# Altium PCB PCB3.PcbDoc (part 2 of 2)
Units mm, origin at the board's own origin, x right, y up, seen from the top; angles counter-clockwise.
Board outline 121.9 x 82.3 mm, 2 copper layers (Top Layer, Bottom Layer); 257 components, 205 nets, 679 pads, 84 vias.
Unrouted connection lines stored in the file: 88.
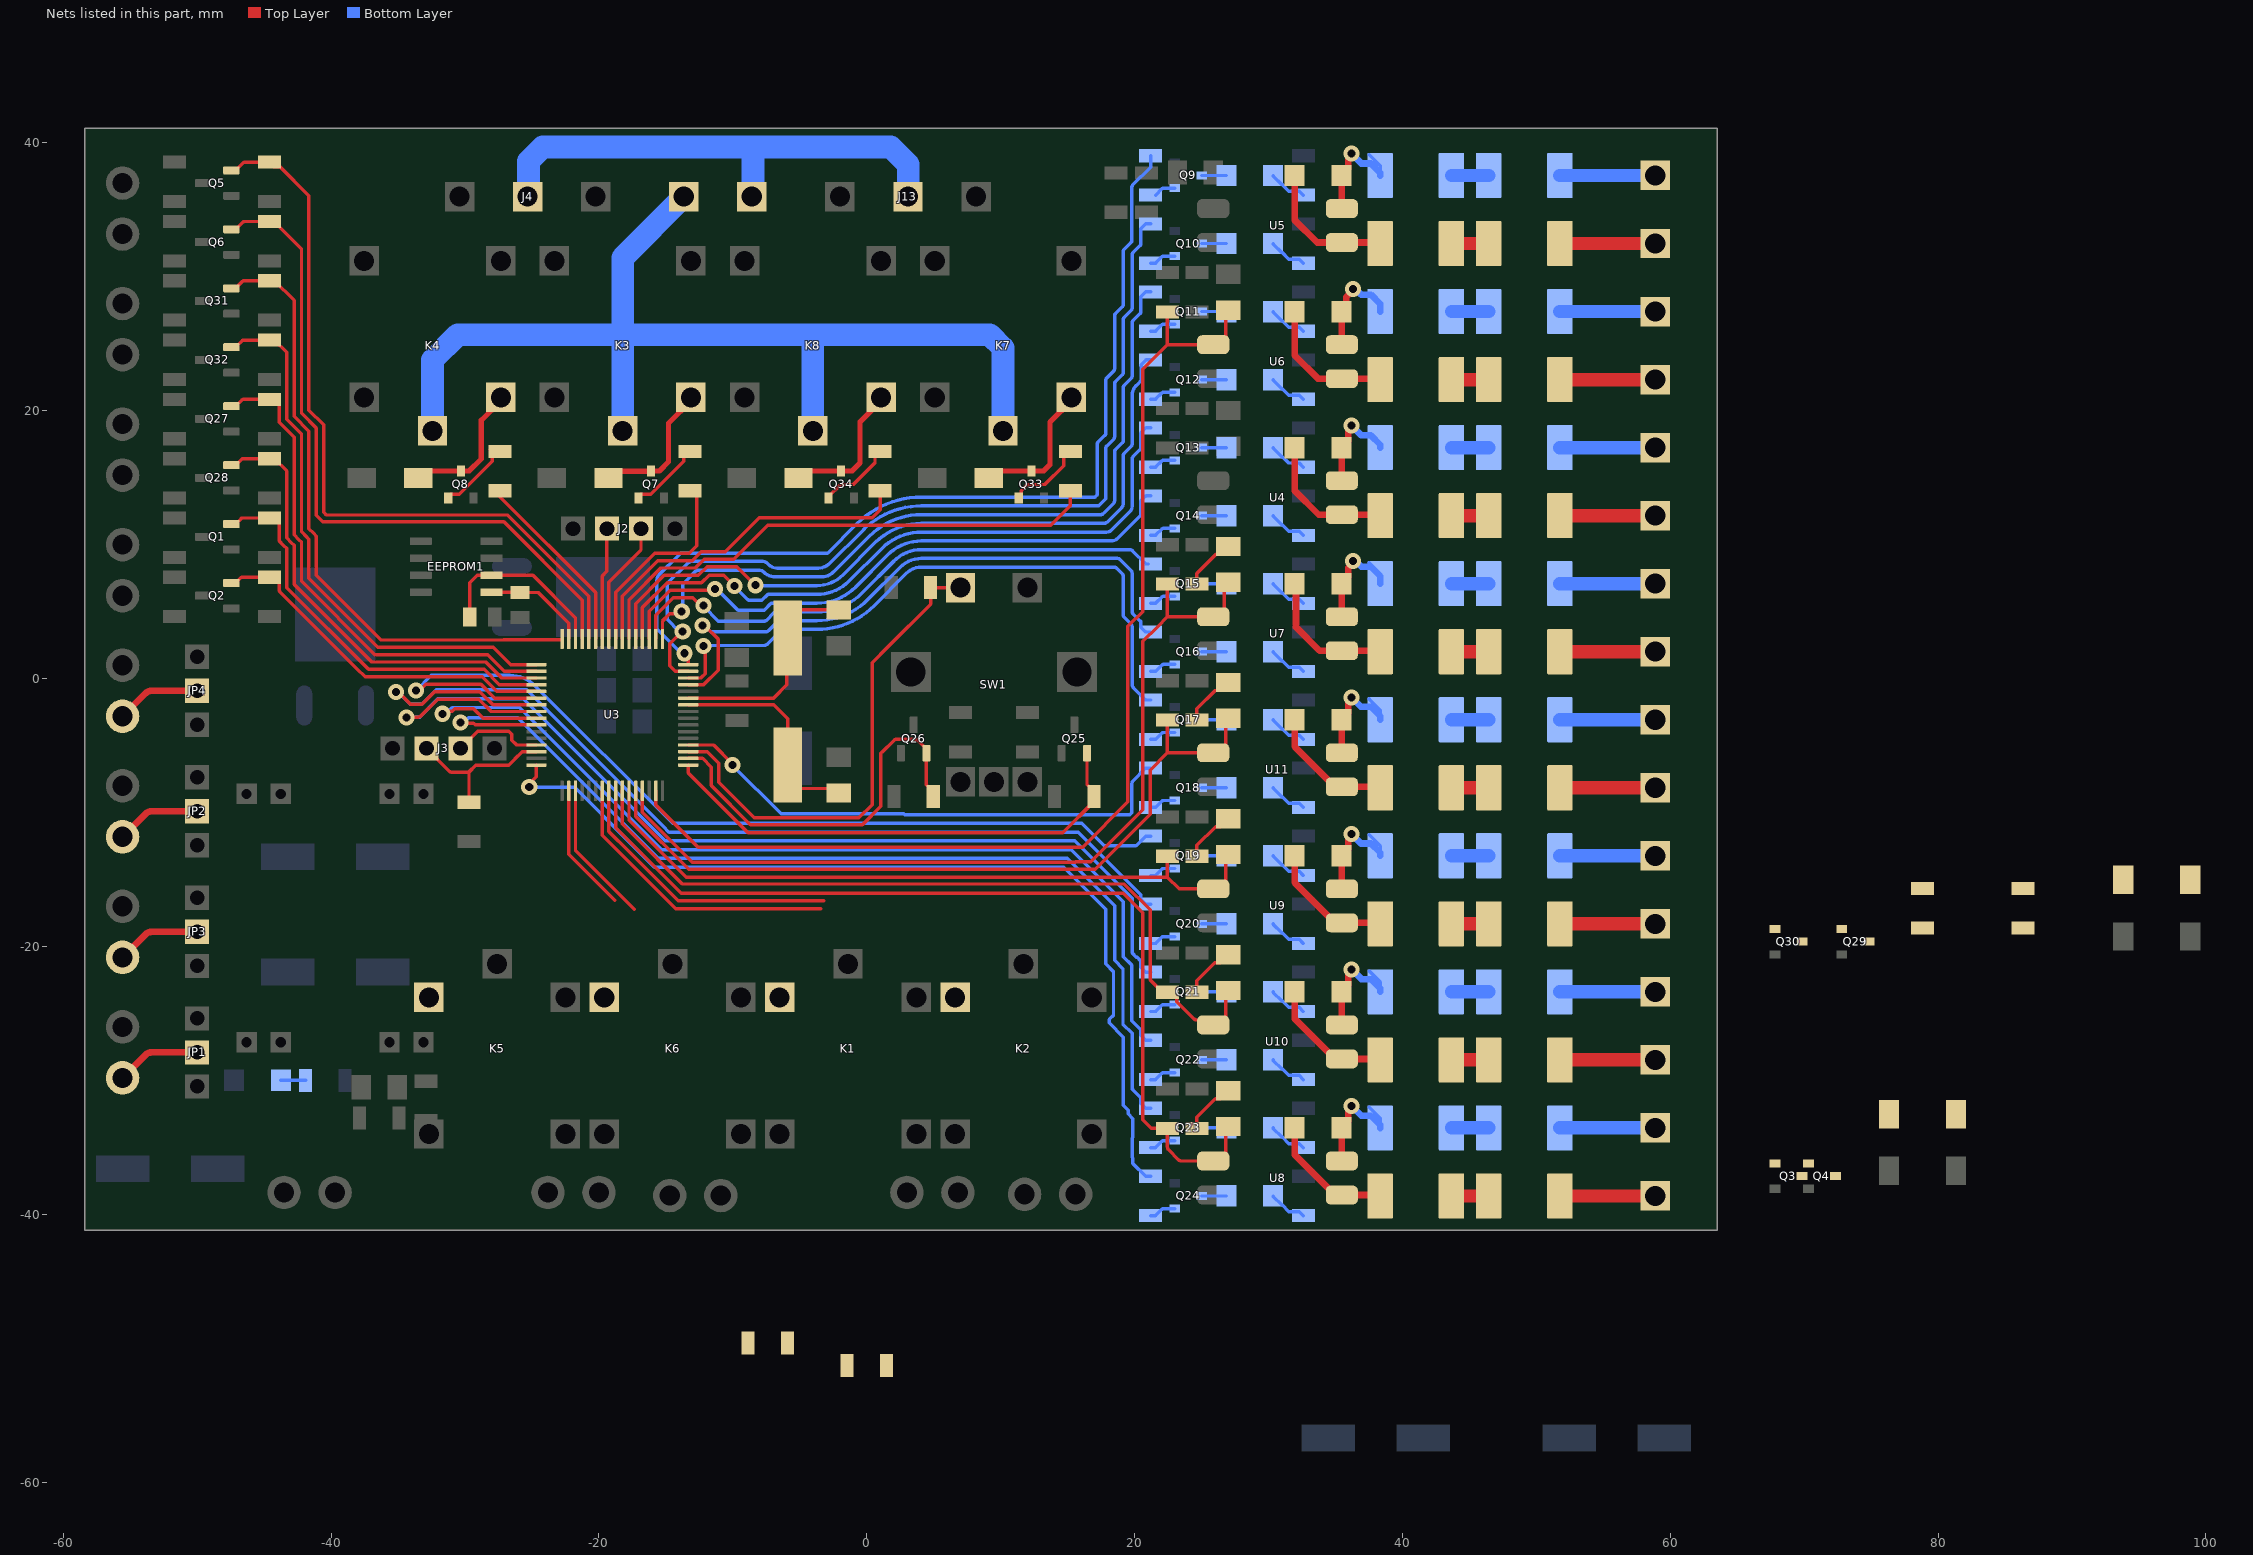
[diagram p2: the nets of this part, all layers, seen from the top]

## Via types
v1: diameter 1.2, hole 0.6, Top Layer to Bottom Layer, tented both sides, 74 vias
v2: diameter 1.2, hole 0.6, Top Layer to Bottom Layer, 10 vias

## Nets (pads, with @x,y where several pads share a name; then routed paths per layer and width w, separated by ;. In a path a pad name is that pad's centre, name@x,y a point inside that pad or via, vN(x,y) a via of type N, cw(c..) or ccw(c..) an arc to the next point about the centre after c; other vN are vias at no path point) (continued)
NetC15_2: C15.2 R77.2 U3.63 U6.3 | length 83.1
  Top Layer w0.254: U3.63@-15.75,-8.37 -15.75,-9.412 -15.736,-9.426 -15.736,-9.44 -12.6,-12.576 16.124,-12.576 19.501,-9.199 19.501,3.901 20.609,5.009 20.609,23.104 22.45,24.945 ; R77.2@22.45,27.385 22.45,24.945 ; U6.3@25.875,24.945 22.45,24.945 ; U6.3@26.254,24.945 26.8,25.491 26.8,27.327 C15.2@26.992,27.519
NetC16_1: C16.1 R80.2 | length 4
  Top Layer w0.254: R80.2@24.656,7.065 24.656,7.856 26.078,9.278 26.399,9.278 C16.1@26.992,9.871
NetC16_2: C16.2 R78.2 U3.61 U7.3 | length 66.4
  Top Layer w0.254: -16.75,-9.993 U3.61@-16.75,-8.37 ; -16.736,-9.993 -16.736,-10.007 -13.046,-13.696 15.578,-13.696 cw(c15.607,-13.726) 15.607,-13.684 16.716,-13.684 20.609,-9.791 20.609,2.784 21.717,3.892 22.45,4.625 ; R78.2@22.45,7.065 22.45,4.625 ; C16.2@26.992,7.199 26.7,6.907 26.7,5.071 26.254,4.625 U7.3@25.875,4.625 22.45,4.625
NetC17_1: C17.1 R91.2 | length 4
  Top Layer w0.254: R91.2@24.656,-33.575 24.656,-32.744 26.038,-31.362 26.399,-31.362 C17.1@26.992,-30.769
NetC17_2: C17.2 R89.2 U3.57 U8.3 | length 70.8
  Top Layer w0.254: U3.57@-18.75,-8.37 -18.75,-11.126 -17.536,-12.341 -13.853,-16.023 19.148,-16.023 20.609,-17.484 20.609,-32.928 21.256,-33.575 22.331,-33.575 cw(c22.331,-33.694) 22.45,-33.694 22.45,-34.97 ccw(c22.763,-34.97) 22.542,-35.191 23.274,-35.923 ccw(c23.495,-35.702) 23.495,-36.015 U8.3@25.875,-36.015 26.15,-36.015 ccw(c26.15,-35.763) 26.328,-35.941 26.8,-35.469 26.8,-33.633 C17.2@26.992,-33.441
NetC18_1: C18.1 R92.2 | length 4
  Top Layer w0.254: R92.2@24.656,-13.255 24.656,-12.444 26.058,-11.042 26.399,-11.042 C18.1@26.992,-10.449
NetC18_2: C18.2 R90.2 U3.59 U9.3 | length 52.8
  Top Layer w0.254: -17.75,-10.559 U3.59@-17.75,-8.37 ; -17.736,-10.559 -17.736,-10.573 -13.489,-14.82 22.45,-14.82 ; R90.2@22.45,-13.255 22.45,-14.82 ; C18.2@26.992,-13.121 26.8,-13.313 26.8,-15.149 26.254,-15.695 U9.3@25.875,-15.695 23.325,-15.695 22.45,-14.82
NetC19_1: C19.1 R103.2 | length 4
  Top Layer w0.254: R103.2@24.656,-23.415 24.656,-22.544 25.998,-21.202 26.399,-21.202 C19.1@26.992,-20.609
NetC19_2: C19.2 R101.2 U3.58 U10.3 | length 59.3
  Top Layer w0.254: U3.58@-18.25,-8.37 -18.25,-10.843 -17.699,-11.394 -17.543,-11.55 -13.759,-15.334 19.234,-15.334 21.163,-17.263 21.163,-22.498 22.08,-23.415 22.777,-23.415 23.14,-23.778 23.14,-24.073 ccw(c23.219,-24.073) 23.164,-24.129 24.45,-25.415 ccw(c24.618,-25.247) 24.618,-25.485 25.452,-25.485 cw(c25.452,-25.611) 25.542,-25.522 25.848,-25.828 ccw(c25.913,-25.763) 25.913,-25.855 26.216,-25.855 ccw(c26.216,-25.763) 26.281,-25.828 26.8,-25.309 26.8,-23.473 C19.2@26.992,-23.281
NetC20_1: C20.1 R104.2 | length 4
  Top Layer w0.254: R104.2@24.656,-3.095 24.656,-2.244 26.018,-0.882 26.399,-0.882 C20.1@26.992,-0.289
NetC20_2: C20.2 R102.2 U3.60 U11.3 | length 57.9
  Top Layer w0.254: -17.25,-10.276 U3.60@-17.25,-8.37 ; -17.236,-10.276 -17.236,-10.29 -13.288,-14.238 17.062,-14.238 21.163,-10.137 21.163,-6.822 22.45,-5.535 ; R102.2@22.45,-3.095 22.45,-5.535 ; C20.2@26.992,-2.961 26.8,-3.153 26.8,-4.989 26.254,-5.535 U11.3@25.875,-5.535 22.45,-5.535
NetD1_2: D1.2 R1.1 | length 1.9
  Bottom Layer w0.254: D1.2@-43.75,-30 R1.1@-41.9,-30
NetD2_A: D2.A K1.5 Q3.3
NetD3_A: D3.A K2.5 Q4.3
NetD4_A: D4.A K3.5 Q7.3 | length 10.1
  Top Layer w0.254: K3.5@-13.125,20.75 K3.5@-13.125,21
  Top Layer w0.4: D4.A@-19.285,15.5 Q7.3@-16.3,15.5 ; Q7.3@-16.1,15.51 -15.49,15.51 -14.8,16.2 -14.8,19.075 K3.5@-13.125,20.75
NetD5_A: D5.A K4.5 Q8.3 | length 10.5
  Top Layer w0.254: D5.A@-33.485,15 D5.A@-32.975,15.51 ; K4.5@-27.325,20.75 K4.5@-27.325,21
  Top Layer w0.4: D5.A@-32.975,15.51 Q8.3@-30.3,15.51 -29.69,15.51 -28.787,16.413 -28.787,19.288 K4.5@-27.325,20.75
NetD6_1: D6.1 Q9.3 | length 1.8
  Bottom Layer w0.254: Q9.3@25.01,37.575 D6.1@26.85,37.575
NetD6_2: D6.2 R20.1 | length 2.9
  Bottom Layer w0.254: D6.2@30.35,37.575 30.35,37.525 30.973,36.902 31.023,36.902 31.52,36.405 32.3,36.405 R20.1@32.6,36.105
NetD7_1: D7.1 Q10.3 | length 1.8
  Bottom Layer w0.254: Q10.3@25.01,32.495 D7.1@26.85,32.495
NetD7_2: D7.2 R21.1 | length 2.9
  Bottom Layer w0.254: D7.2@30.35,32.495 30.35,32.445 30.973,31.822 31.023,31.822 31.52,31.325 32.3,31.325 R21.1@32.6,31.025
NetD8_1: D8.1 Q11.3 | length 1.8
  Bottom Layer w0.254: Q11.3@25.01,27.415 D8.1@26.85,27.415
NetD8_2: D8.2 R22.1 | length 2.9
  Bottom Layer w0.254: D8.2@30.35,27.415 30.35,27.365 30.973,26.742 31.023,26.742 31.52,26.245 32.3,26.245 R22.1@32.6,25.945
NetD9_1: D9.1 Q12.3 | length 1.8
  Bottom Layer w0.254: Q12.3@25.01,22.335 D9.1@26.85,22.335
NetD9_2: D9.2 R23.1 | length 2.9
  Bottom Layer w0.254: D9.2@30.35,22.335 30.35,22.285 30.973,21.662 31.023,21.662 31.52,21.165 32.3,21.165 R23.1@32.6,20.865
NetD10_1: D10.1 Q13.3 | length 1.8
  Bottom Layer w0.254: Q13.3@25.01,17.255 D10.1@26.85,17.255
NetD10_2: D10.2 R24.1 | length 2.9
  Bottom Layer w0.254: D10.2@30.35,17.255 30.35,17.205 30.973,16.582 31.023,16.582 31.501,16.104 32.281,16.104 R24.1@32.6,15.785
NetD11_1: D11.1 Q14.3 | length 1.8
  Bottom Layer w0.254: Q14.3@25.01,12.175 D11.1@26.85,12.175
NetD11_2: D11.2 R25.1 | length 2.9
  Bottom Layer w0.254: D11.2@30.35,12.175 30.35,12.125 30.973,11.502 31.023,11.502 31.52,11.005 32.3,11.005 R25.1@32.6,10.705
NetD12_1: D12.1 Q15.3 | length 1.8
  Bottom Layer w0.254: Q15.3@25.01,7.095 D12.1@26.85,7.095
NetD12_2: D12.2 R26.1 | length 2.9
  Bottom Layer w0.254: D12.2@30.35,7.095 30.35,7.045 30.973,6.422 31.023,6.422 31.509,5.936 32.289,5.936 R26.1@32.6,5.625
NetD13_1: D13.1 Q16.3 | length 1.8
  Bottom Layer w0.254: Q16.3@25.01,2.015 D13.1@26.85,2.015
NetD13_2: D13.2 R27.1 | length 2.9
  Bottom Layer w0.254: D13.2@30.35,2.015 30.35,1.965 30.973,1.342 31.023,1.342 31.52,0.845 32.3,0.845 R27.1@32.6,0.545
NetD14_1: D14.1 Q17.3 | length 1.8
  Bottom Layer w0.254: Q17.3@25.01,-3.065 D14.1@26.85,-3.065
NetD14_2: D14.2 R36.1 | length 2.9
  Bottom Layer w0.254: D14.2@30.35,-3.065 30.35,-3.115 30.973,-3.738 31.023,-3.738 31.52,-4.235 32.3,-4.235 R36.1@32.6,-4.535
NetD15_1: D15.1 Q18.3 | length 1.8
  Bottom Layer w0.254: Q18.3@25.01,-8.145 D15.1@26.85,-8.145
NetD15_2: D15.2 R37.1 | length 2.9
  Bottom Layer w0.254: D15.2@30.35,-8.145 30.35,-8.195 30.973,-8.818 31.023,-8.818 31.512,-9.307 32.292,-9.307 R37.1@32.6,-9.615
NetD16_1: D16.1 Q19.3 | length 1.8
  Bottom Layer w0.254: Q19.3@25.01,-13.225 D16.1@26.85,-13.225
NetD16_2: D16.2 R38.1 | length 2.9
  Bottom Layer w0.254: D16.2@30.35,-13.225 30.35,-13.275 30.973,-13.898 31.023,-13.898 31.508,-14.383 32.288,-14.383 R38.1@32.6,-14.695
NetD17_1: D17.1 Q20.3 | length 1.8
  Bottom Layer w0.254: Q20.3@25.01,-18.305 D17.1@26.85,-18.305
NetD17_2: D17.2 R39.1 | length 2.9
  Bottom Layer w0.254: D17.2@30.35,-18.305 30.35,-18.355 30.973,-18.978 31.023,-18.978 31.509,-19.464 32.289,-19.464 R39.1@32.6,-19.775
NetD18_1: D18.1 Q21.3 | length 1.8
  Bottom Layer w0.254: Q21.3@25.01,-23.385 D18.1@26.85,-23.385
NetD18_2: D18.2 R40.1 | length 2.9
  Bottom Layer w0.254: D18.2@30.35,-23.385 30.35,-23.435 30.973,-24.058 31.023,-24.058 31.503,-24.538 32.283,-24.538 R40.1@32.6,-24.855
NetD19_1: D19.1 Q22.3 | length 1.8
  Bottom Layer w0.254: Q22.3@25.01,-28.465 D19.1@26.85,-28.465
NetD19_2: D19.2 R41.1 | length 2.9
  Bottom Layer w0.254: D19.2@30.35,-28.465 30.35,-28.515 30.973,-29.138 31.023,-29.138 31.505,-29.62 32.285,-29.62 R41.1@32.6,-29.935
NetD20_1: D20.1 Q23.3 | length 1.8
  Bottom Layer w0.254: Q23.3@25.01,-33.545 D20.1@26.85,-33.545
NetD20_2: D20.2 R42.1 | length 2.9
  Bottom Layer w0.254: D20.2@30.35,-33.545 30.35,-33.595 30.973,-34.218 31.023,-34.218 31.52,-34.715 32.3,-34.715 R42.1@32.6,-35.015
NetD21_1: D21.1 Q24.3 | length 1.8
  Bottom Layer w0.254: Q24.3@25.01,-38.625 D21.1@26.85,-38.625
NetD21_2: D21.2 R43.1 | length 2.9
  Bottom Layer w0.254: D21.2@30.35,-38.625 30.35,-38.675 30.973,-39.298 31.023,-39.298 31.52,-39.795 32.3,-39.795 R43.1@32.6,-40.095
NetD22_1: D22.1 R58.2 U4.1 | length 10.9
  Top Layer w0.254: U4.1@34.975,12.245 U4.1@35.475,12.245 ; R58.2@38.27,12.245 R58.2@38.34,12.175
  Top Layer w0.5: D22.1@31.95,17.255 31.95,14.05 33.755,12.245 34.975,12.245 U4.1@35.475,12.245 R58.2@38.27,12.245
NetD22_2: D22.2 R62.2 U4.2 | length 7.4
  Top Layer w0.254: D22.2@35.45,17.255 D22.2@35.475,17.23
  Top Layer w0.5: D22.2@35.45,17.255 35.95,17.755 35.95,18.461 36.2,18.711 v1(36.2,18.9) ; U4.2@35.475,14.785 D22.2@35.475,17.23
  Bottom Layer w0.5: v1(36.2,18.9) 36.933,18.167 37.64,18.167 38.34,17.467 R62.2@38.34,17.255
NetD23_1: D23.1 R60.2 U5.1 | length 10.4
  Top Layer w0.254: R60.2@38.27,32.565 R60.2@38.34,32.495
  Top Layer w0.5: D23.1@31.95,37.575 31.95,34.25 33.635,32.565 R60.2@38.27,32.565
NetD23_2: D23.2 R64.2 U5.2 | length 9.2
  Top Layer w0.254: D23.2@35.45,37.575 D23.2@35.475,37.55
  Top Layer w0.5: D23.2@35.45,37.575 35.95,38.075 35.95,38.761 36.2,39.011 v1(36.2,39.2) ; U5.2@35.475,35.105 D23.2@35.475,37.55
  Bottom Layer w0.254: R64.2@37.517,39.133 38.34,38.31 R64.2@38.34,37.575
  Bottom Layer w0.5: v1(36.2,39.2) 36.933,38.467 37.64,38.467 38.34,37.767 R64.2@38.34,37.575
NetD24_1: D24.1 R70.2 U6.1 | length 10.9
  Top Layer w0.254: U6.1@34.975,22.405 U6.1@35.475,22.405 ; R70.2@38.27,22.405 R70.2@38.34,22.335
  Top Layer w0.5: D24.1@31.95,27.415 31.95,24.15 33.695,22.405 34.975,22.405 U6.1@35.475,22.405 R70.2@38.27,22.405
NetD24_2: D24.2 R74.2 U6.2 | length 7.6
  Top Layer w0.254: D24.2@35.475,27.39 D24.2@35.45,27.415 D24.2@35.8,27.765 ; v1@36.3,28.978 v1(36.3,29.1)
  Top Layer w0.5: U6.2@35.475,24.945 D24.2@35.475,27.39 ; D24.2@35.8,27.765 35.8,28.478 v1@36.3,28.978
  Bottom Layer w0.5: v1(36.3,29.1) 36.489,29.1 36.915,28.675 37.64,28.675 38.34,27.975 R74.2@38.34,27.415
NetD25_1: D25.1 R72.2 U7.1 | length 10.3
  Top Layer w0.5: D25.1@31.95,7.095 32.05,6.995 32.05,3.85 33.815,2.085 38.27,2.085 R72.2@38.34,2.015
NetD25_2: D25.2 R76.2 U7.2 | length 9.5
  Top Layer w0.254: D25.2@35.45,7.095 D25.2@35.475,7.07
  Top Layer w0.5: D25.2@35.45,7.095 35.95,7.595 35.95,8.261 36.3,8.611 v1(36.3,8.8) ; U7.2@35.475,4.625 D25.2@35.475,7.07
  Bottom Layer w0.254: R76.2@37.517,8.653 38.34,7.83 R76.2@38.34,7.095
  Bottom Layer w0.5: v1(36.3,8.8) 36.489,8.8 36.935,8.355 37.64,8.355 38.34,7.655 R76.2@38.34,7.095
NetD26_1: D26.1 R82.2 U8.1 | length 9.7
  Top Layer w0.254: U8.1@34.975,-38.555 U8.1@35.475,-38.555 ; R82.2@38.27,-38.555 R82.2@38.34,-38.625
  Top Layer w0.5: D26.1@31.95,-33.545 31.95,-35.53 U8.1@34.975,-38.555 ; U8.1@35.475,-38.555 R82.2@38.27,-38.555
NetD26_2: D26.2 R86.2 U8.2 | length 9.3
  Top Layer w0.254: D26.2@35.45,-33.545 D26.2@35.475,-33.57
  Top Layer w0.5: D26.2@35.45,-33.545 35.95,-33.045 35.95,-32.339 36.2,-32.089 v1(36.2,-31.9) ; U8.2@35.475,-36.015 D26.2@35.475,-33.57
  Bottom Layer w0.254: R86.2@37.517,-31.987 38.34,-32.81 R86.2@38.34,-33.545
  Bottom Layer w0.5: v1(36.2,-31.9) 36.933,-32.633 37.64,-32.633 38.34,-33.333 R86.2@38.34,-33.545
NetD27_1: D27.1 R84.2 U9.1 | length 9.7
  Top Layer w0.254: U9.1@34.975,-18.235 U9.1@35.475,-18.235 ; R84.2@38.27,-18.235 R84.2@38.34,-18.305
  Top Layer w0.5: D27.1@31.95,-13.225 31.95,-15.21 U9.1@34.975,-18.235 ; U9.1@35.475,-18.235 R84.2@38.27,-18.235
NetD27_2: D27.2 R88.2 U9.2 | length 9.3
  Top Layer w0.254: D27.2@35.45,-13.225 D27.2@35.475,-13.25
  Top Layer w0.5: D27.2@35.45,-13.225 35.95,-12.725 35.95,-12.039 36.2,-11.789 v1(36.2,-11.6) ; U9.2@35.475,-15.695 D27.2@35.475,-13.25
  Bottom Layer w0.254: R88.2@37.517,-11.667 38.34,-12.49 R88.2@38.34,-13.225
  Bottom Layer w0.5: v1(36.2,-11.6) 36.9,-12.3 37.64,-12.3 38.34,-13 R88.2@38.34,-13.225
NetD28_1: D28.1 R94.2 U10.1 | length 9.7
  Top Layer w0.254: U10.1@34.975,-28.395 U10.1@35.475,-28.395 ; R94.2@38.27,-28.395 R94.2@38.34,-28.465
  Top Layer w0.5: D28.1@31.95,-23.385 31.95,-25.37 U10.1@34.975,-28.395 ; U10.1@35.475,-28.395 R94.2@38.27,-28.395
NetD28_2: D28.2 R98.2 U10.2 | length 9.4
  Top Layer w0.254: D28.2@35.45,-23.385 D28.2@35.475,-23.41
  Top Layer w0.5: D28.2@35.45,-23.385 35.95,-22.885 35.95,-22.139 36.2,-21.889 v1(36.2,-21.7) ; U10.2@35.475,-25.855 D28.2@35.475,-23.41
  Bottom Layer w0.254: R98.2@37.517,-21.827 38.34,-22.65 R98.2@38.34,-23.385
  Bottom Layer w0.5: v1(36.2,-21.7) 36.933,-22.433 37.64,-22.433 38.34,-23.133 R98.2@38.34,-23.385
NetD29_1: D29.1 R96.2 U11.1 | length 9.7
  Top Layer w0.254: U11.1@34.975,-8.075 U11.1@35.475,-8.075 ; R96.2@38.27,-8.075 R96.2@38.34,-8.145
  Top Layer w0.5: D29.1@31.95,-3.065 31.95,-5.05 U11.1@34.975,-8.075 ; U11.1@35.475,-8.075 R96.2@38.27,-8.075
NetD29_2: D29.2 R100.2 U11.2 | length 9.3
  Top Layer w0.254: D29.2@35.45,-3.065 D29.2@35.475,-3.09
  Top Layer w0.5: D29.2@35.45,-3.065 35.95,-2.565 35.95,-1.839 36.2,-1.589 v1(36.2,-1.4) ; U11.2@35.475,-5.535 D29.2@35.475,-3.09
  Bottom Layer w0.254: R100.2@37.517,-1.507 37.517,-1.537 38.34,-2.36 R100.2@38.34,-3.065
  Bottom Layer w0.5: v1(36.2,-1.4) 36.9,-2.1 37.64,-2.1 38.34,-2.8 R100.2@38.34,-3.065
NetD30_A: D30.A K5.5 Q29.3
NetD31_A: D31.A K6.5 Q30.3
NetD32_A: D32.A K7.5 Q33.3 | length 10.7
  Top Layer w0.4: D32.A@9.115,15 9.625,15.51 13.21,15.51 13.684,15.984 13.684,19.159 15.275,20.75 K7.5@15.275,21
NetD33_A: D33.A K8.5 Q34.3 | length 10.6
  Top Layer w0.4: D33.A@-5.1,15 -4.59,15.51 Q34.3@-1.915,15.51 -1.09,15.51 -0.5,16.1 -0.5,19.175 1.075,20.75 K8.5@1.075,21
NetJ1_1: J1.1 K3.1 K4.1 K7.1 K8.1 | length 81.4
  Bottom Layer w1.7: K4.1@-32.425,18.5 -32.425,23.802 -30.548,25.679 -18.943,25.679 cw(c-18.943,24.961) -18.225,24.961 K3.1@-18.225,18.5 ; J1.1@-13.665,36 -18.225,31.44 -18.225,25.679 -4.025,25.679 ; K8.1@-4.025,18.5 -4.025,25.454 -3.8,25.679 9.179,25.679 10.175,24.684 K7.1@10.175,18.5
NetJ1_2: J1.2 J4.02 J13.02 | length 38
  Bottom Layer w1.7: J4.02@-25.254,36.071 -25.254,38.646 -24.2,39.7 -8.5,39.7 ; J1.2@-8.5,36.085 -8.5,39.7 ; J13.02@3.1,36.02 3.1,38.4 1.8,39.7 -8.5,39.7
  Bottom Layer w1.8: J4.02@-25.325,36 J4.02@-25.254,36.071 ; J13.02@3.08,36 J13.02@3.1,36.02
NetJ5_1: J5.1 R61.1 | length 7.1
  Bottom Layer w1: R61.1@51.76,17.255 J5.1@58.875,17.255
NetJ5_2: J5.2 R57.1 | length 7.1
  Top Layer w1: R57.1@51.76,12.175 J5.2@58.875,12.175
NetJ6_1: J6.1 R63.1 | length 7.1
  Bottom Layer w1: R63.1@51.76,37.575 J6.1@58.875,37.575
NetJ6_2: J6.2 R59.1 | length 7.1
  Top Layer w1: R59.1@51.76,32.495 J6.2@58.875,32.495
NetJ7_1: J7.1 R73.1 | length 7.1
  Bottom Layer w1: R73.1@51.76,27.415 J7.1@58.875,27.415
NetJ7_2: J7.2 R69.1 | length 7.1
  Top Layer w1: R69.1@51.76,22.335 J7.2@58.875,22.335
NetJ8_1: J8.1 R75.1 | length 7.1
  Bottom Layer w1: R75.1@51.76,7.095 J8.1@58.875,7.095
NetJ8_2: J8.2 R71.1 | length 7.1
  Top Layer w1: R71.1@51.76,2.015 J8.2@58.875,2.015
NetJ9_1: J9.1 R85.1 | length 7.1
  Bottom Layer w1: R85.1@51.76,-33.545 J9.1@58.875,-33.545
NetJ9_2: J9.2 R81.1 | length 7.1
  Top Layer w1: R81.1@51.76,-38.625 J9.2@58.875,-38.625
NetJ10_1: J10.1 R87.1 | length 7.1
  Bottom Layer w1: R87.1@51.76,-13.225 J10.1@58.875,-13.225
NetJ10_2: J10.2 R83.1 | length 7.1
  Top Layer w1: R83.1@51.76,-18.305 J10.2@58.875,-18.305
NetJ11_1: J11.1 R97.1 | length 7.1
  Bottom Layer w1: R97.1@51.76,-23.385 J11.1@58.875,-23.385
NetJ11_2: J11.2 R93.1 | length 7.1
  Top Layer w1: R93.1@51.76,-28.465 J11.2@58.875,-28.465
NetJ12_1: J12.1 R99.1 | length 7.1
  Bottom Layer w1: R99.1@51.76,-3.065 J12.1@58.875,-3.065
NetJ12_2: J12.2 R95.1 | length 7.1
  Top Layer w1: R95.1@51.76,-8.145 J12.2@58.875,-8.145
NetQ1_2: Q1.2 R10.1 U3.36 | length 30.4
  Top Layer w0.254: Q1.2@-47.44,11.546 -47.156,11.546 ccw(c-47.156,11.622) -47.103,11.569 -46.718,11.953 cw(c-46.609,11.844) -46.609,11.999 R10.1@-44.766,11.999 ; R10.1@-44.6,11.999 -44.23,11.999 -43.867,11.636 -43.867,10.279 -43.516,9.928 -43.313,9.725 -43.313,6.804 -37.202,0.693 -28.574,0.693 -27.431,-0.45 U3.36@-24.67,-0.45
NetQ2_2: Q2.2 R11.1 U3.37 | length 26.8
  Top Layer w0.254: Q2.2@-47.44,7.145 -47.156,7.145 ccw(c-47.156,7.221) -47.103,7.167 -46.742,7.527 cw(c-46.64,7.425) -46.64,7.57 -44.23,7.57 -43.867,7.207 -43.867,6.615 ccw(c-43.708,6.615) -43.821,6.503 -38.075,0.758 -37.456,0.139 -28.708,0.139 -27.619,-0.95 U3.37@-24.67,-0.95
NetQ3_1: Q3.1 R12.1
NetQ4_1: Q4.1 R13.1
NetQ5_2: Q5.2 R16.1 U3.28 | length 56.5
  Top Layer w0.254: Q5.2@-47.44,37.955 -47.156,37.955 ccw(c-47.156,38.031) -47.103,37.977 -46.571,38.508 cw(c-46.423,38.36) -46.423,38.57 R16.1@-44.791,38.57 ; R16.1@-44.6,38.57 -44.237,38.207 -43.807,38.207 -41.651,36.051 -41.651,20.054 -40.543,18.946 -40.543,12.422 -40.34,12.219 -26.818,12.219 -20.764,6.165 -20.764,6.151 ; U3.28@-20.75,2.97 -20.75,6.151
NetQ6_2: Q6.2 R17.1 U3.29 | length 52.1
  Top Layer w0.254: Q6.2@-47.44,33.554 -47.156,33.554 ccw(c-47.156,33.63) -47.103,33.576 -46.596,34.083 cw(c-46.454,33.941) -46.454,34.141 -44.23,34.141 -43.867,33.778 -43.867,33.736 -42.205,32.074 -42.205,19.825 -41.097,18.717 -41.097,12.192 -40.61,11.705 -27.088,11.705 -21.25,5.867 U3.29@-21.25,2.97
NetQ7_1: Q7.1 R18.1 | length 5.6
  Top Layer w0.254: Q7.1@-17.05,13.49 -17.05,13.59 -16.877,13.763 -16.137,13.763 -13.652,16.248 -13.652,16.607 -13.289,16.97 R18.1@-13.2,16.97
NetQ8_1: Q8.1 R19.1 | length 5.6
  Top Layer w0.254: Q8.1@-31.25,13.49 -31.25,13.59 -31.077,13.763 -30.437,13.763 -27.952,16.248 -27.952,16.607 -27.589,16.97 R19.1@-27.4,16.97
NetQ9_1: Q9.1 R28.1 | length 1.6
  Bottom Layer w0.254: R28.1@21.57,36.105 22.038,36.573 cw(c22.164,36.447) 22.164,36.625 Q9.1@22.99,36.625
NetQ10_1: Q10.1 R29.1 | length 2
  Bottom Layer w0.254: R29.1@21.2,31.025 21.533,31.025 ccw(c21.533,31.114) 21.596,31.051 22.038,31.493 cw(c22.164,31.367) 22.164,31.545 Q10.1@22.99,31.545
NetQ11_1: Q11.1 R30.1 | length 2
  Bottom Layer w0.254: R30.1@21.2,25.945 21.533,25.945 ccw(c21.533,26.034) 21.596,25.971 22.038,26.413 cw(c22.164,26.287) 22.164,26.465 Q11.1@22.99,26.465
NetQ12_1: Q12.1 R31.1 | length 2
  Bottom Layer w0.254: R31.1@21.2,20.865 21.533,20.865 ccw(c21.533,20.954) 21.596,20.891 22.038,21.333 cw(c22.164,21.207) 22.164,21.385 Q12.1@22.99,21.385
NetQ13_1: Q13.1 R32.1 | length 2
  Bottom Layer w0.254: R32.1@21.2,15.785 21.533,15.785 ccw(c21.533,15.874) 21.596,15.811 22.038,16.253 cw(c22.164,16.127) 22.164,16.305 Q13.1@22.99,16.305
NetQ14_1: Q14.1 R33.1 | length 2
  Bottom Layer w0.254: R33.1@21.2,10.705 21.533,10.705 ccw(c21.533,10.794) 21.596,10.731 22.038,11.173 cw(c22.164,11.047) 22.164,11.225 Q14.1@22.99,11.225
NetQ15_1: Q15.1 R34.1 | length 2
  Bottom Layer w0.254: R34.1@21.2,5.625 21.533,5.625 ccw(c21.533,5.714) 21.596,5.651 22.038,6.093 cw(c22.164,5.967) 22.164,6.145 Q15.1@22.99,6.145
NetQ16_1: Q16.1 R35.1 | length 2
  Bottom Layer w0.254: R35.1@21.2,0.545 21.533,0.545 ccw(c21.533,0.634) 21.596,0.571 22.038,1.013 cw(c22.164,0.887) 22.164,1.065 Q16.1@22.99,1.065
NetQ17_1: Q17.1 R44.1 | length 2
  Bottom Layer w0.254: R44.1@21.2,-4.535 21.533,-4.535 ccw(c21.533,-4.446) 21.596,-4.509 22.038,-4.067 cw(c22.164,-4.193) 22.164,-4.015 Q17.1@22.99,-4.015
NetQ18_1: Q18.1 R45.1 | length 2
  Bottom Layer w0.254: R45.1@21.2,-9.615 21.533,-9.615 ccw(c21.533,-9.526) 21.596,-9.589 22.038,-9.147 cw(c22.164,-9.273) 22.164,-9.095 Q18.1@22.99,-9.095
NetQ19_1: Q19.1 R46.1 | length 2
  Bottom Layer w0.254: R46.1@21.2,-14.695 21.533,-14.695 ccw(c21.533,-14.606) 21.596,-14.669 22.038,-14.227 cw(c22.164,-14.353) 22.164,-14.175 Q19.1@22.99,-14.175
NetQ20_1: Q20.1 R47.1 | length 2
  Bottom Layer w0.254: R47.1@21.2,-19.775 21.533,-19.775 ccw(c21.533,-19.686) 21.596,-19.749 22.038,-19.307 cw(c22.164,-19.433) 22.164,-19.255 Q20.1@22.99,-19.255
NetQ21_1: Q21.1 R48.1 | length 2
  Bottom Layer w0.254: R48.1@21.2,-24.855 21.533,-24.855 ccw(c21.533,-24.766) 21.596,-24.829 22.038,-24.387 cw(c22.164,-24.513) 22.164,-24.335 Q21.1@22.99,-24.335
NetQ22_1: Q22.1 R49.1 | length 2
  Bottom Layer w0.254: R49.1@21.2,-29.935 21.533,-29.935 ccw(c21.533,-29.846) 21.596,-29.909 22.038,-29.467 cw(c22.164,-29.593) 22.164,-29.415 Q22.1@22.99,-29.415
NetQ23_1: Q23.1 R50.1 | length 2
  Bottom Layer w0.254: R50.1@21.2,-35.015 21.533,-35.015 ccw(c21.533,-34.926) 21.596,-34.989 22.038,-34.547 cw(c22.164,-34.673) 22.164,-34.495 Q23.1@22.99,-34.495
NetQ24_1: Q24.1 R51.1 | length 2
  Bottom Layer w0.254: R51.1@21.2,-40.095 21.533,-40.095 ccw(c21.533,-40.006) 21.596,-40.069 22.038,-39.627 cw(c22.164,-39.753) 22.164,-39.575 Q24.1@22.99,-39.575
NetQ25_2: Q25.2 R55.2 U3.1 | length 37.2
  Top Layer w0.254: U3.1@-13.33,-6.45 -13.33,-7.037 -13.31,-7.057 -8.867,-11.5 14.64,-11.5 16.97,-9.17 R55.2@16.97,-8.8 ; Q25.2@16.45,-5.56 16.45,-7.91 R55.2@16.97,-8.43
NetQ26_2: Q26.2 R56.1 U3.2 | length 29.6
  Top Layer w0.254: U3.2@-13.33,-5.95 -12.262,-5.95 -11.608,-6.604 -11.608,-7.976 -8.683,-10.9 -0.315,-10.9 1.054,-9.531 1.054,-5.581 1.16,-5.475 2.011,-4.624 cw(c2.267,-4.881) 2.267,-4.518 3.62,-4.518 cw(c3.62,-4.766) 3.796,-4.591 4.45,-5.245 4.45,-7.91 4.97,-8.43 R56.1@4.97,-8.8
NetQ27_2: Q27.2 R107.1 U3.34 | length 38.1
  Top Layer w0.254: Q27.2@-47.44,20.349 -47.156,20.349 ccw(c-47.156,20.425) -47.103,20.372 -46.669,20.805 cw(c-46.547,20.683) -46.547,20.856 R107.1@-44.705,20.856 ; R107.1@-44.6,20.856 -44.23,20.856 -43.867,20.493 -43.867,19.137 -42.759,18.029 -42.759,10.738 -42.408,10.387 -42.205,10.184 -42.205,7.262 -36.744,1.801 -28.305,1.801 -27.055,0.55 U3.34@-24.67,0.55
NetQ28_2: Q28.2 R108.1 U3.35 | length 34.4
  Top Layer w0.254: Q28.2@-47.44,15.948 -47.125,15.948 -46.646,16.427 -44.23,16.427 -43.313,15.51 -43.313,10.509 -42.962,10.158 -42.759,9.955 -42.759,7.033 -36.973,1.247 -28.44,1.247 -27.243,0.05 U3.35@-24.67,0.05
NetQ29_1: Q29.1 R109.1
NetQ30_1: Q30.1 R110.1
NetQ31_2: Q31.2 R113.1 U3.32 | length 47.1
  Top Layer w0.254: Q31.2@-47.44,29.152 -47.156,29.152 ccw(c-47.156,29.228) -47.103,29.174 -46.62,29.657 cw(c-46.485,29.521) -46.485,29.713 -44.23,29.713 -42.759,28.242 -42.759,19.596 -41.651,18.488 -41.651,11.197 -41.3,10.846 -41.097,10.643 -41.097,7.721 -36.262,2.886 -27.114,2.886 -27.1,2.9 -22.75,2.9 U3.32@-22.75,2.97
NetQ32_2: Q32.2 R114.1 U3.33 | length 41.8
  Top Layer w0.254: Q32.2@-47.44,24.751 -47.156,24.751 ccw(c-47.156,24.827) -47.103,24.773 -46.645,25.231 cw(c-46.516,25.102) -46.516,25.284 R114.1@-44.763,25.284 ; R114.1@-44.6,25.284 -44.23,25.284 -43.313,24.367 -43.313,19.366 -42.205,18.258 -42.205,10.968 -41.854,10.617 -41.651,10.414 -41.651,7.492 -36.514,2.355 -27.883,2.355 -26.578,1.05 U3.33@-24.67,1.05
NetQ33_1: Q33.1 R115.1 | length 5.9
  Top Layer w0.254: Q33.1@11.35,13.49 11.523,13.663 11.523,14.023 12,14.5 13.3,14.5 14.7,15.9 14.7,16.607 15.063,16.97 R115.1@15.2,16.97
NetQ34_1: Q34.1 R116.1 | length 5.6
  Top Layer w0.254: Q34.1@-2.865,13.49 -2.865,13.59 -1.955,14.5 -1,14.5 0.615,16.115 0.615,16.607 0.978,16.97 R116.1@0.985,16.97
NetR12_2: R12.2 U3.55 | length 21.9
  Top Layer w0.254: U3.55@-19.75,-8.37 -19.75,-11.693 -17.994,-13.449 -14.278,-17.165 -3.416,-17.165
NetR13_2: R13.2 U3.56 | length 21.2
  Top Layer w0.254: U3.56@-19.25,-8.37 -19.25,-11.41 -17.765,-12.895 -14.083,-16.577 -3.22,-16.577
NetR18_2: R18.2 U3.24 | length 15.4
  Top Layer w0.254: U3.24@-18.75,2.97 -18.75,6.449 -15.826,9.373 -13.259,9.373 -12.7,9.931 -12.7,13.667 -13.063,14.03 R18.2@-13.2,14.03
NetR19_2: R19.2 U3.27 | length 14
  Top Layer w0.254: R19.2@-27.4,14.03 -27.4,13.584 -20.25,6.434 U3.27@-20.25,2.97
NetR28_2: R28.2 U3.16 | length 69.6
  Top Layer w0.254: v1(-13.6,1.9) -13.33,1.63 U3.16@-13.33,1.062
  Bottom Layer w0.254: v1(-13.6,1.9) -13.856,1.9 -15.673,3.717 -15.673,7.344 cw(c-15.054,7.344) -15.492,7.781 -14.041,9.232 -13.901,9.372 -2.928,9.372 -0.738,11.562 cw(c4.084,6.739) 4.084,13.559 17.027,13.559 ccw(c17.027,13.61) 17.063,13.574 ; 17.063,13.574 17.182,13.693 ccw(c17.146,13.729) 17.197,13.729 17.197,17.484 cw(c17.42,17.484) 17.262,17.642 17.786,18.165 ; 17.786,18.166 ccw(c17.628,18.323) 17.851,18.323 17.851,22.293 cw(c18.074,22.293) 17.916,22.451 18.44,22.975 ; 18.44,22.975 ccw(c18.282,23.132) 18.505,23.132 18.505,27.103 cw(c18.728,27.103) 18.57,27.26 19.094,27.784 ccw(c18.936,27.942) 19.159,27.942 19.159,31.914 cw(c19.378,31.914) 19.223,32.068 19.736,32.581 ; 19.736,32.581 ccw(c19.581,32.736) 19.8,32.736 19.8,36.706 cw(c20.028,36.706) 19.867,36.867 21.2,38.2 R28.2@21.2,39.045
NetR29_2: R29.2 U3.15 | length 66.1
  Top Layer w0.254: v1(-13.741,3.52) -13.795,3.52 -14.7,2.615 -14.7,0.958 -14.292,0.55 U3.15@-13.33,0.55
  Bottom Layer w0.254: v1(-13.741,3.52) -13.997,3.52 -14.9,4.423 -14.9,6.865 cw(c-14.333,6.865) -14.734,7.266 -13.407,8.593 cw(c-13.006,8.193) -13.006,8.759 -7.773,8.759 cw(c-7.773,8.277) -7.431,8.618 -7.347,8.534 ccw(c-6.673,9.208) -6.673,8.255 -3.633,8.255 ccw(c-3.633,9.494) -2.757,8.618 -0.276,11.099 cw(c4.084,6.739) 4.084,12.905 17.244,12.905 ccw(c17.244,13.087) 17.372,12.958 17.798,13.384 ccw(c17.669,13.512) 17.851,13.512 17.851,17.213 cw(c18.074,17.213) 17.916,17.371 18.44,17.895 ccw(c18.282,18.052) 18.505,18.052 18.505,22.023 cw(c18.728,22.023) 18.57,22.18 19.094,22.704 ccw(c18.936,22.862) 19.159,22.862 19.159,26.832 cw(c19.382,26.832) 19.224,26.99 19.748,27.513 ccw(c19.59,27.671) 19.813,27.671 19.813,31.641 cw(c20.036,31.641) 19.878,31.799 20.402,32.322 ccw(c20.244,32.48) 20.467,32.48 20.467,33.551 cw(c20.591,33.551) 20.503,33.638 20.804,33.939 cw(c20.867,33.876) 20.867,33.965 R29.2@21.2,33.965
NetR30_2: R30.2 U3.17 | length 56.9
  Top Layer w0.254: U3.17@-15.25,2.97 -15.25,4.308 -14.717,4.841 -13.997,4.841 v1(-13.816,5.022)
  Bottom Layer w0.254: v1(-13.816,5.022) -13.752,5.085 -13.752,7.048 -12.798,8.002 cw(c-12.548,7.752) -12.548,8.105 -8.043,8.105 cw(c-8.043,7.623) -7.702,7.964 ccw(c-6.826,8.84) -6.826,7.601 -3.363,7.601 ccw(c-3.363,8.84) -2.486,7.964 0.186,10.637 cw(c4.084,6.739) 4.084,12.251 17.461,12.251 ccw(c17.461,12.563) 17.682,12.342 18.414,13.074 ccw(c18.193,13.295) 18.505,13.295 18.505,16.943 cw(c18.728,16.943) 18.57,17.1 19.094,17.624 ccw(c18.936,17.782) 19.159,17.782 19.159,21.752 cw(c19.382,21.752) 19.224,21.91 19.748,22.433 ccw(c19.59,22.591) 19.813,22.591 19.813,26.561 cw(c20.036,26.561) 19.878,26.719 20.402,27.242 ccw(c20.244,27.4) 20.467,27.4 20.467,28.471 cw(c20.591,28.471) 20.503,28.558 20.804,28.859 cw(c20.867,28.796) 20.867,28.885 R30.2@21.2,28.885
NetR31_2: R31.2 U3.21 | length 54.8
  Top Layer w0.254: U3.21@-17.25,2.97 -17.25,5.598 -15.138,7.711 -12.57,7.711 -11.91,8.371 -9.703,8.371 v1(-8.31,6.978)
  Bottom Layer w0.254: v1(-8.31,6.978) -8.282,6.95 ccw(c-8.275,6.958) -8.275,6.947 -3.732,6.947 ccw(c-3.732,9.731) -1.763,7.763 0.649,10.174 cw(c4.084,6.739) 4.084,11.597 17.677,11.597 ccw(c17.677,12.04) 17.991,11.727 19.029,12.765 ccw(c18.716,13.079) 19.159,13.079 19.159,16.672 cw(c19.382,16.672) 19.224,16.83 19.748,17.353 ccw(c19.59,17.511) 19.813,17.511 19.813,21.158 cw(c20.816,21.158) 20.107,21.867 20.262,22.022 20.472,22.232 ccw(c20.416,22.289) 20.495,22.289 20.495,23.391 cw(c20.619,23.391) 20.532,23.478 20.834,23.781 cw(c20.893,23.723) 20.893,23.805 R31.2@21.2,23.805
NetR32_2: R32.2 U3.20 | length 50
  Top Layer w0.254: U3.20@-16.75,2.97 -16.75,5.315 -14.908,7.157 -12.341,7.157 -11.772,7.725 -10.661,7.725 v1(-9.864,6.929)
  Bottom Layer w0.254: v1(-9.864,6.929) -9.864,6.877 -8.909,5.922 ccw(c-8.739,6.092) -8.739,5.851 -7.906,5.851 ccw(c-7.906,6.002) -7.799,5.896 -7.446,6.249 cw(c-7.339,6.142) -7.339,6.293 -3.732,6.293 ccw(c-3.732,9.731) -1.3,7.3 1.111,9.712 cw(c4.084,6.739) 4.084,10.943 17.894,10.943 ccw(c17.894,11.517) 18.3,11.111 19.645,12.456 ccw(c19.239,12.862) 19.813,12.862 19.813,16.401 cw(c20.036,16.401) 19.878,16.559 20.402,17.082 ccw(c20.244,17.24) 20.467,17.24 20.467,18.311 cw(c20.591,18.311) 20.503,18.398 20.804,18.699 cw(c20.867,18.636) 20.867,18.725 R32.2@21.2,18.725
NetR33_2: R33.2 U3.19 | length 44.6
  Top Layer w0.254: U3.19@-16.25,2.97 -16.25,5.031 -14.679,6.603 -11.443,6.603 v1(-11.347,6.698)
  Bottom Layer w0.254: v1(-11.347,6.698) -11.211,6.698 -9.612,5.1 -7.746,5.1 ccw(c-7.746,5.284) -7.616,5.154 -7.185,5.585 cw(c-7.055,5.455) -7.055,5.639 -3.732,5.639 ccw(c-3.732,9.731) -0.838,6.838 1.574,9.249 cw(c4.084,6.739) 4.084,10.289 18.281,10.289 ccw(c18.281,10.943) 18.743,10.481 20.391,12.128 ccw(c20.207,12.312) 20.467,12.312 20.467,13.231 cw(c20.591,13.231) 20.503,13.318 20.804,13.619 cw(c20.867,13.556) 20.867,13.645 R33.2@21.2,13.645
NetR34_2: R34.2 U3.18 | length 42.1
  Top Layer w0.254: U3.18@-15.75,2.97 -15.75,4.748 -14.449,6.049 -12.981,6.049 -12.388,5.456 v1(-12.187,5.456)
  Bottom Layer w0.254: v1(-12.187,5.456) -12.187,5.405 -11.082,4.3 -7.642,4.3 ccw(c-7.642,4.534) -7.477,4.368 -6.929,4.917 cw(c-6.763,4.751) -6.763,4.985 -3.732,4.985 ccw(c-3.732,9.731) -0.375,6.375 2.036,8.787 cw(c4.084,6.739) 4.084,9.635 19.609,9.635 cw(c19.609,9.27) 19.867,9.528 20.817,8.578 ccw(c20.849,8.61) 20.849,8.565 R34.2@21.015,8.565
NetR35_2: R35.2 U3.13 | length 46.5
  Top Layer w0.254: U3.13@-13.33,-0.45 -12.178,-0.45 -12.164,-0.436 -12.155,-0.436 -11.1,0.619 -11.1,2.963 -12.095,3.958 v1(-12.269,3.958)
  Bottom Layer w0.254: v1(-12.269,3.958) -12.105,3.958 -11.648,3.5 -7.538,3.5 ccw(c-7.538,3.784) -7.337,3.583 -6.672,4.248 cw(c-6.472,4.047) -6.472,4.331 -3.732,4.331 ccw(c-3.732,9.731) 0.087,5.913 2.499,8.324 cw(c4.084,6.739) 4.084,8.981 18.707,8.981 cw(c18.707,8.65) 18.941,8.884 19.716,8.109 cw(c19.482,7.875) 19.813,7.875 19.813,5.009 ccw(c20.036,5.009) 19.878,4.851 20.438,4.292 cw(c20.367,4.221) 20.467,4.221 20.467,3.889 ccw(c20.567,3.889) 20.496,3.819 20.804,3.511 ccw(c20.867,3.574) 20.867,3.485 R35.2@21.2,3.485
NetR44_2: R44.2 U3.14 | length 47.5
  Top Layer w0.254: U3.14@-13.33,0.05 -12.396,0.05 -12.358,0.088 -12.064,0.382 -12.064,2.302 v1(-12.2,2.438)
  Bottom Layer w0.254: v1(-12.2,2.438) -12.164,2.474 -7.691,2.474 ccw(c-7.691,2.885) -7.401,2.594 -6.439,3.557 cw(c-6.148,3.266) -6.148,3.677 -3.732,3.677 ccw(c-3.732,9.731) 0.549,5.45 2.961,7.862 cw(c4.084,6.739) 4.084,8.327 18.49,8.327 cw(c18.49,8.127) 18.632,8.268 19.1,7.8 cw(c18.959,7.658) 19.159,7.658 19.159,4.738 ccw(c19.382,4.738) 19.224,4.58 19.748,4.057 cw(c19.59,3.899) 19.813,3.899 19.813,-0.434 ccw(c20.16,-0.434) 19.915,-0.68 20.804,-1.569 ccw(c20.867,-1.506) 20.867,-1.595 R44.2@21.2,-1.595
NetR45_2: R45.2 U3.4 | length 39.5
  Top Layer w0.254: U3.4@-13.33,-4.95 -11.441,-4.95 -10.027,-6.364 v1(-10.027,-6.458)
  Bottom Layer w0.254: v1(-10.027,-6.458) -6.384,-10.1 2.774,-10.1 2.823,-10.149 19.651,-10.149 19.8,-10 19.8,-7.855 cw(c20.153,-7.855) 19.903,-7.606 20.804,-6.701 cw(c20.867,-6.764) 20.867,-6.675 R45.2@21.2,-6.675
NetR46_2: R46.2 U3.38 | length 70.4
  Top Layer w0.254: v1(-33.649,-0.888) -33.393,-0.888 -32.92,-0.415 -28.802,-0.415 -27.767,-1.45 U3.38@-24.67,-1.45
  Bottom Layer w0.254: v1(-33.649,-0.888) -32.511,0.25 -26.646,0.25 cw(c-26.646,-2.396) -24.775,-0.525 -14.497,-10.803 16.068,-10.803 17.742,-12.477 20.108,-12.477 20.83,-11.755 R46.2@21.2,-11.755
NetR47_2: R47.2 U3.39 | length 75.6
  Top Layer w0.254: v1(-35.146,-0.98) -35.023,-0.98 cw(c-35.023,-1.014) -34.999,-0.99 -34.134,-1.855 ccw(c-33.989,-1.71) -33.989,-1.915 -33.309,-1.915 ccw(c-33.309,-1.71) -33.163,-1.855 -32.277,-0.969 -28.89,-0.969 -27.909,-1.95 U3.39@-24.67,-1.95
  Bottom Layer w0.254: v1(-35.146,-0.98) -35.009,-0.98 -34.074,-1.915 -33.223,-1.915 -32.148,-0.84 -25.385,-0.84 -15.19,-11.035 -14.768,-11.457 15.797,-11.457 20.467,-16.127 20.467,-16.472 20.83,-16.835 R47.2@21.2,-16.835
NetR48_2: R48.2 U3.40 | length 77.9
  Top Layer w0.254: v1(-34.371,-2.898) -34.341,-2.868 cw(c-34.334,-2.876) -34.334,-2.865 -33.485,-2.865 ccw(c-33.485,-2.636) -33.323,-2.798 -32.048,-1.523 -28.978,-1.523 -28.051,-2.45 U3.40@-24.67,-2.45
  Bottom Layer w0.254: v1(-34.371,-2.898) -34.338,-2.865 -33.39,-2.865 -32.019,-1.494 -25.656,-1.494 -15.844,-11.306 -15.039,-12.111 15.526,-12.111 19.813,-16.398 19.813,-20.483 20.122,-20.792 20.187,-20.792 20.439,-21.044 20.439,-21.109 cw(c20.367,-21.179) 20.467,-21.179 20.467,-21.511 ccw(c20.567,-21.511) 20.496,-21.581 20.804,-21.889 ccw(c20.867,-21.826) 20.867,-21.915 R48.2@21.2,-21.915
NetR49_2: R49.2 U3.41 | length 75.9
  Top Layer w0.254: v1(-31.694,-2.621) -31.513,-2.44 -30.958,-2.44 -30.779,-2.261 cw(c-30.731,-2.309) -30.731,-2.241 -29.459,-2.241 cw(c-29.459,-2.483) -29.288,-2.312 -28.65,-2.95 U3.41@-24.67,-2.95
  Bottom Layer w0.254: v1(-31.694,-2.621) -31.438,-2.621 -30.971,-2.154 -25.92,-2.154 -16.498,-11.577 -15.31,-12.765 15.255,-12.765 19.159,-16.669 19.159,-20.754 19.785,-21.38 19.785,-25.535 20.467,-26.217 20.467,-26.632 20.83,-26.995 R49.2@21.2,-26.995
NetR50_2: R50.2 U3.42 | length 77
  Top Layer w0.254: v1(-30.347,-3.281) -30.305,-3.323 -29.366,-3.323 -29.239,-3.45 U3.42@-24.67,-3.45
  Bottom Layer w0.254: v1(-30.347,-3.281) -30.091,-3.281 -29.736,-2.927 -26.073,-2.927 -17.152,-11.847 -15.581,-13.419 14.984,-13.419 18.505,-16.94 18.505,-21.025 19.131,-21.651 19.131,-25.806 19.813,-26.488 19.813,-26.581 19.813,-30.551 ccw(c20.036,-30.551) 19.878,-30.709 20.438,-31.268 cw(c20.367,-31.339) 20.467,-31.339 20.467,-31.671 ccw(c20.567,-31.671) 20.496,-31.741 20.804,-32.049 ccw(c20.867,-31.986) 20.867,-32.075 R50.2@21.2,-32.075
NetR51_2: R51.2 U3.48 | length 70.6
  Top Layer w0.254: v1(-25.2,-8.1) -25.2,-7.844 -24.67,-7.314 U3.48@-24.67,-6.45
  Bottom Layer w0.254: v1(-25.2,-8.1) -21.96,-8.1 cw(c-21.96,-8.969) -21.812,-8.113 -17.806,-12.118 -15.851,-14.073 14.713,-14.073 17.851,-17.211 17.851,-21.296 18.427,-21.872 18.427,-25.118 18.1,-25.445 18.1,-25.7 19.159,-26.759 19.159,-31.858 19.527,-32.226 19.527,-32.497 19.877,-32.847 19.877,-34.243 19.813,-34.307 19.813,-35.723 19.877,-35.787 19.877,-36.202 20.83,-37.155 R51.2@21.2,-37.155
NetR52_1: R52.1 SW1.4 U3.3 | length 37.3
  Top Layer w0.254: U3.3@-13.33,-5.45 -11.924,-5.45 -11.054,-6.32 -11.054,-7.746 -8.414,-10.386 -0.585,-10.386 0.4,-9.401 0.4,1.204 1.623,2.427 4.77,5.574 R52.1@4.77,6.8 SW1.4@7,6.8
NetR57_2: R57.2 R58.1 | length 2.8
  Top Layer w1: R58.1@43.66,12.175 R57.2@46.44,12.175
NetR59_2: R59.2 R60.1 | length 2.8
  Top Layer w1: R60.1@43.66,32.495 R59.2@46.44,32.495
NetR61_2: R61.2 R62.1 | length 2.8
  Bottom Layer w1: R62.1@43.66,17.255 R61.2@46.44,17.255
NetR63_2: R63.2 R64.1 | length 2.8
  Bottom Layer w1: R64.1@43.66,37.575 R63.2@46.44,37.575
NetR69_2: R69.2 R70.1 | length 2.8
  Top Layer w1: R70.1@43.66,22.335 R69.2@46.44,22.335
NetR71_2: R71.2 R72.1 | length 2.8
  Top Layer w1: R72.1@43.66,2.015 R71.2@46.44,2.015
NetR73_2: R73.2 R74.1 | length 2.8
  Bottom Layer w1: R74.1@43.66,27.415 R73.2@46.44,27.415
NetR75_2: R75.2 R76.1 | length 2.8
  Bottom Layer w1: R76.1@43.66,7.095 R75.2@46.44,7.095
NetR81_2: R81.2 R82.1 | length 2.8
  Top Layer w1: R82.1@43.66,-38.625 R81.2@46.44,-38.625
NetR83_2: R83.2 R84.1 | length 2.8
  Top Layer w1: R84.1@43.66,-18.305 R83.2@46.44,-18.305
NetR85_2: R85.2 R86.1 | length 2.8
  Bottom Layer w1: R86.1@43.66,-33.545 R85.2@46.44,-33.545
NetR87_2: R87.2 R88.1 | length 2.8
  Bottom Layer w1: R88.1@43.66,-13.225 R87.2@46.44,-13.225
NetR93_2: R93.2 R94.1 | length 2.8
  Top Layer w1: R94.1@43.66,-28.465 R93.2@46.44,-28.465
NetR95_2: R95.2 R96.1 | length 2.8
  Top Layer w1: R96.1@43.66,-8.145 R95.2@46.44,-8.145
NetR97_2: R97.2 R98.1 | length 2.8
  Bottom Layer w1: R98.1@43.66,-23.385 R97.2@46.44,-23.385
NetR99_2: R99.2 R100.1 | length 2.8
  Bottom Layer w1: R100.1@43.66,-3.065 R99.2@46.44,-3.065
NetR109_2: R109.2 U3.50 | length 9.6
  Top Layer w0.254: U3.50@-22.25,-8.37 -22.25,-13.111 -18.809,-16.552
NetR110_2: R110.2 U3.51 | length 10.7
  Top Layer w0.254: U3.51@-21.75,-8.37 -21.75,-12.827 -17.37,-17.207
NetR115_2: R115.2 U3.22 | length 39.9
  Top Layer w0.254: U3.22@-17.75,2.97 -17.75,5.882 -15.367,8.265 -12.8,8.265 -12.139,8.925 -9.922,8.925 -7.391,11.455 13.755,11.455 15.2,12.9 R115.2@15.2,14.03
NetR116_2: R116.2 U3.23 | length 26.5
  Top Layer w0.254: U3.23@-18.25,2.97 -18.25,6.165 -15.597,8.819 -13.029,8.819 -12.369,9.479 -10.562,9.479 -8.031,12.009 0.402,12.009 1,12.608 R116.2@1,14.03
OSC_IN: C7.2 U3.10 Y1.1 | length 16.5
  Top Layer w0.254: U3.10@-13.33,-1.95 -6.95,-1.95 -5.9,-3 -5.9,-7.277 -4.977,-8.2 -2.436,-8.2 C7.2@-2.1,-8.536
OSC_OUT: C6.2 U3.11 Y1.2 | length 16.7
  Top Layer w0.254: U3.11@-13.33,-1.45 -6.958,-1.45 -6.95,-1.442 -6.942,-1.442 -5.967,-0.467 -5.967,2.983 Y1.2@-5.9,3.05 -5.9,4.213 -4.977,5.136 C6.2@-2.1,5.136
power_ENC_1: JP2.2 P6.2 | length 6.3
  Top Layer w0.5: P6.2@-55.565,-11.805 -53.85,-10.09 cw(c-53.391,-10.55) -53.391,-9.9 JP2.2@-50,-9.9
power_ENC_2: JP4.2 P12.2 | length 6.3
  Top Layer w0.5: P12.2@-55.565,-2.805 -53.85,-1.091 cw(c-53.391,-1.55) -53.391,-0.9 JP4.2@-50,-0.9
power_ENC_3: JP1.2 P5.2 | length 6.3
  Top Layer w0.5: P5.2@-55.565,-29.805 -53.85,-28.091 cw(c-53.391,-28.55) -53.391,-27.9 JP1.2@-50,-27.9
power_ENC_4: JP3.2 P11.2 | length 6.3
  Top Layer w0.5: P11.2@-55.565,-20.805 -53.851,-19.091 cw(c-53.391,-19.55) -53.391,-18.9 JP3.2@-50,-18.9
RX: J2.02 U3.26 | length 8.4
  Top Layer w0.254: U3.26@-19.75,2.97 -19.75,7.667 -19.4,8.017 J2.02@-19.4,11.2
SCL: EEPROM1.5 R6.1 U3.30 | length 13.6
  Top Layer w0.254: R6.1@-29.635,4.6 -29.635,7.165 -29.075,7.725 -28.026,7.725 EEPROM1.5@-28.023,7.722 -24.922,7.722 -21.75,4.55 U3.30@-21.75,2.97
SDA: EEPROM1.4 R7.1 U3.31 | length 7.9
  Top Layer w0.254: EEPROM1.4@-28.023,6.452 -25.9,6.441 -24.535,6.435 -22.25,4.15 U3.31@-22.25,2.97
SWDCLK: J3.03 R4.1 U3.46 | length 11.8
  Top Layer w0.254: J3.03@-32.874,-5.2 -31.171,-6.903 ccw(c-30.937,-6.668) -30.937,-7 -29.73,-7 ccw(c-29.73,-6.97) -29.7,-6.97 -29.199,-6.469 -26.741,-6.469 -26.273,-6.001 -26.273,-5.999 -25.724,-5.45 U3.46@-24.67,-5.45 ; R4.1@-29.7,-9.23 -29.7,-7
SWDIO: J3.02 U3.45 | length 6.9
  Top Layer w0.254: J3.02@-30.327,-5.193 -29.053,-3.919 -26.736,-3.919 -26.513,-4.142 -26.513,-4.587 -26.15,-4.95 U3.45@-24.67,-4.95
TX: J2.03 U3.25 | length 9.2
  Top Layer w0.254: U3.25@-19.25,2.97 -19.25,7.217 -16.86,9.607 J2.03@-16.86,11.2
pads on no net: K3.2 K4.2 K7.2 K8.2 U3.5 U3.43 U3.44 U3.49 U3.52 U3.53 U3.54

## Polygon pours and split planes (outlines as drawn)
GND on Top Layer "NONET_L01_P-001" (solid, remove dead copper, shelved, pour order 19): -58,41 28,41 28,-41 -58,-41
jack_extend2 on Top Layer "NONET_L-01_P-001" (solid, remove dead copper, shelved, pour order 12): -18.4,-32.8 -18.4,-39.5 -15.4,-39.5 -15.4,-32.8
jack_retract2 on Top Layer "NONET_L-01_P-001" (solid, remove dead copper, shelved, pour order 11): -13.6,-39.4 -13.6,-36.8 -11.63,-36.8 -11.63,-32.6 -12.5,-32.6 -12.5,-31.9 -9.5,-31.9 -9.5,-39.4
jack_retract1 on Top Layer "NONET_L-01_P-001" (solid, remove dead copper, shelved, pour order 9): 4.4,-39.4 4.4,-36.8 6.37,-36.8 6.37,-32.6 5.5,-32.6 5.5,-31.9 8.5,-31.9 8.5,-39.4
jack_extend1 on Top Layer "NONET_L-01_P-001" (solid, remove dead copper, shelved, pour order 8): -0.4,-32.8 -0.4,-39.5 2.6,-39.5 2.6,-32.8
GND on Bottom Layer "NONET_L01_P-001" (solid, remove dead copper, shelved, pour order 18): -58,41 30,41 30,-41 -58,-41

## Other copper
Top Layer:
  pour cut-out: 18.9,42.1 -40.9,42.1 -40.9,15 18.9,15
Bottom Layer:
  pour cut-out: 17.7,42.1 -40.1,42.1 -40.1,16.3 17.7,16.3

## Silkscreen, mask and mechanical layers (free items; w line width, h text height)
Top Solder:
  lines w0.254: -6.23,-31.598 cw(c-6.232,-31.83) -6,-31.83 ; 9.675,-31.575 9.698,-31.598 ; 9.704,-31.6 cw(c9.704,-31.591) 9.703,-31.6 cw(c9.704,-31.591) 9.698,-31.598 ; 9.698,-31.598 ccw(c9.704,-31.591) 9.698,-31.598 ; 9.698,-31.598 9.698,-31.598
  lines w0.4: -11.63,-31.575 -9.419,-31.575 -8.3,-31.583 ; 6.37,-31.575 9.675,-31.575
  lines w1: -8.3,-31.583 -6.23,-31.598 ; -6,-31.655 -6,-33.3 -3.595,-35.705 -3.595,-38.365 ; 9.703,-31.6 9.704,-31.6 11.77,-31.6 ; 12.055,-31.655 12.235,-31.655 12.235,-31.835 14.405,-34.005 14.405,-38.365
Bottom Solder:
  lines w1: -37.525,31.2 -35.205,31.2 -30.405,36 ; -32.425,18.5 -32.425,23.802 -30.548,25.679 -18.943,25.679 cw(c-18.943,24.961) -18.225,24.961 -18.225,18.5 ; -25.325,36 -25.254,36.071 -25.254,38.646 -24.2,39.7 -8.5,39.7 ; -23.325,31.2 -23.325,31.369 -20.395,34.299 -20.395,35.85 -20.245,36 ; -13.665,36 -18.225,31.44 -18.225,25.679 -4.025,25.679 ; -9.125,31.2 -6.8,31.2 -2,36 ; -8.5,36.085 -8.5,39.7 ; -4.025,18.5 -4.025,25.454 -3.8,25.679 9.179,25.679 10.175,24.684 10.175,18.5 ; 3.08,36 3.1,36.02 3.1,38.4 1.8,39.7 -8.5,39.7 ; 5.075,31.2 5.075,31.45 5.325,31.45 8.16,34.285 8.16,36
Mechanical 1:
  the board outline again, w0.1

## Text inside footprints (layer, text, board x,y; h text height)
*1: Top Overlay "mp1584 module" at -39.7,-12.873 h1.52 r270
D1: Bottom Overlay "+" at -42.7,-29.55 h0.89 r180
D6: Bottom Overlay "+" at 31.4,38.025 h0.89 r180
D7: Bottom Overlay "+" at 31.4,32.945 h0.89 r180
D8: Bottom Overlay "+" at 31.4,27.865 h0.89 r180
D9: Bottom Overlay "+" at 31.4,22.785 h0.89 r180
D10: Bottom Overlay "+" at 31.4,17.705 h0.89 r180
D11: Bottom Overlay "+" at 31.4,12.625 h0.89 r180
D12: Bottom Overlay "+" at 31.4,7.545 h0.89 r180
D13: Bottom Overlay "+" at 31.4,2.465 h0.89 r180
D14: Bottom Overlay "+" at 31.4,-2.615 h0.89 r180
D15: Bottom Overlay "+" at 31.4,-7.695 h0.89 r180
D16: Bottom Overlay "+" at 31.4,-12.775 h0.89 r180
D17: Bottom Overlay "+" at 31.4,-17.855 h0.89 r180
D18: Bottom Overlay "+" at 31.4,-22.935 h0.89 r180
D19: Bottom Overlay "+" at 31.4,-28.015 h0.89 r180
D20: Bottom Overlay "+" at 25.8,-33.995 h0.89
D21: Bottom Overlay "+" at 31.4,-38.175 h0.89 r180
D22: Top Overlay "+" at 36.5,16.805 h0.89
D23: Top Overlay "+" at 36.5,37.125 h0.89
D24: Top Overlay "+" at 36.5,26.965 h0.89
D25: Top Overlay "+" at 36.5,6.645 h0.89
D26: Top Overlay "+" at 36.5,-33.995 h0.89
D27: Top Overlay "+" at 36.5,-13.675 h0.89
D28: Top Overlay "+" at 36.5,-23.835 h0.89
D29: Top Overlay "+" at 36.5,-3.515 h0.89
SW1: Bottom Overlay "E" at 5.7,7.4 h1; Bottom Overlay "D" at 13.9,7.3 h1; Bottom Overlay "C" at 9.9,-5.7 h1; Bottom Overlay "B" at 5.7,-7.7 h1; Bottom Overlay "A" at 14,-7.7 h1